# EAGLE board 13827-SparkFun Qwiic Adapter-panel.v10 (EAGLE 7.1.0), part 1 of 3
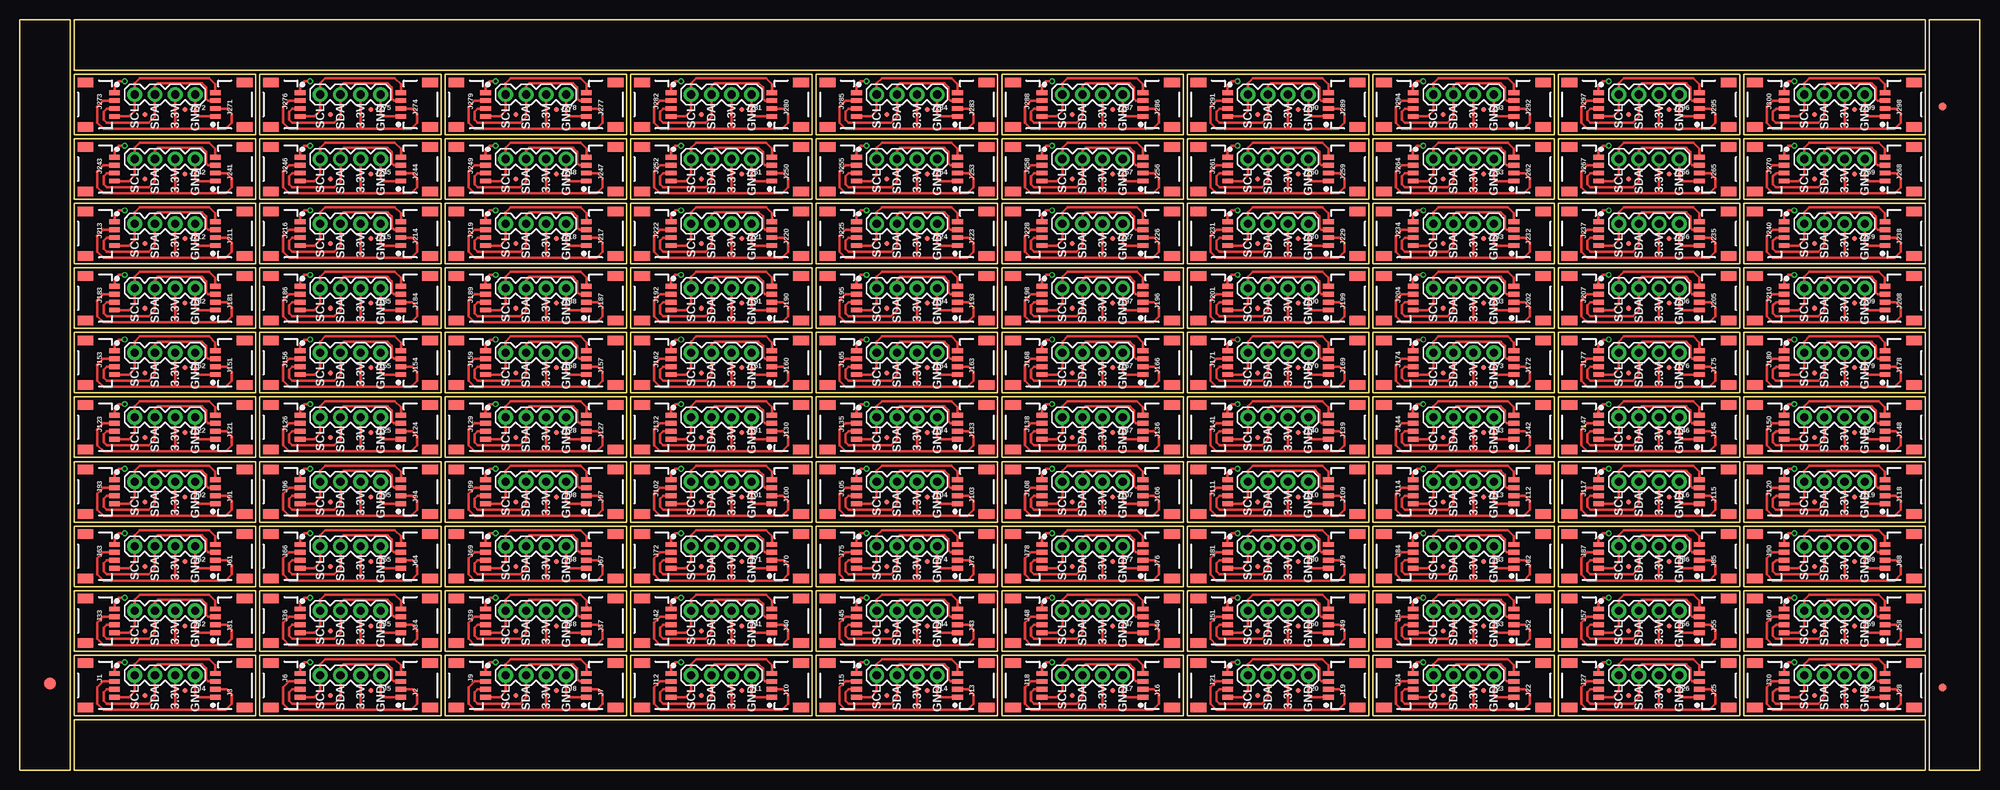
[diagram p0: board, top side]
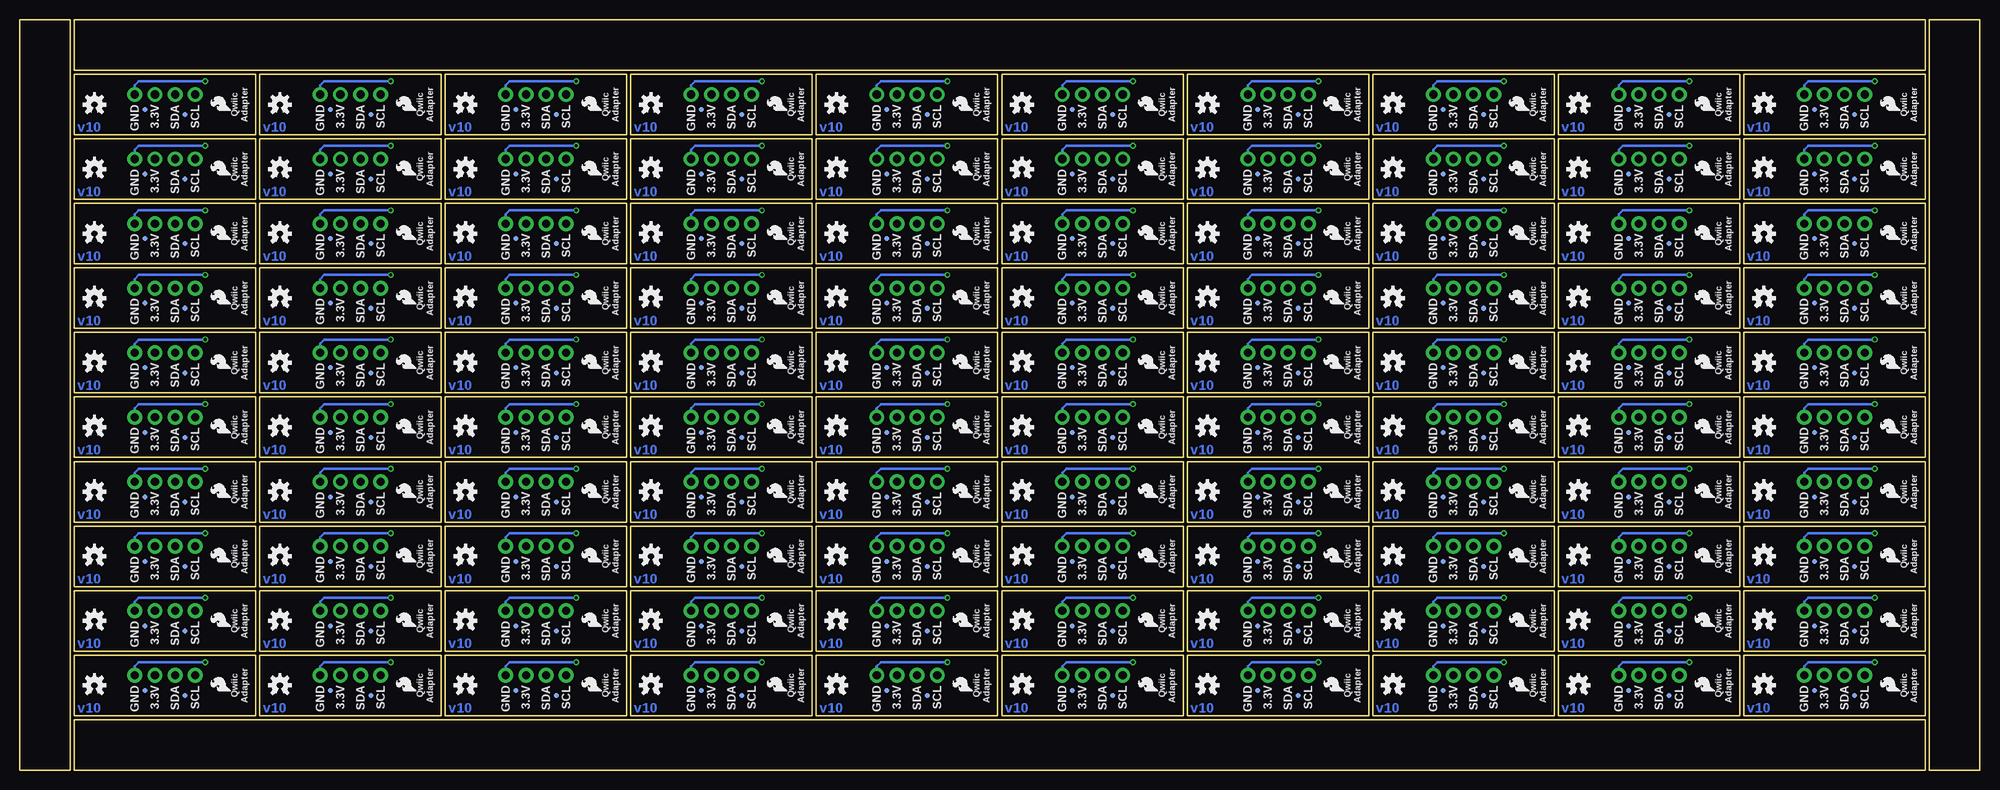
[diagram p1: board, bottom side, seen from below]

Size 246.89 x 94.49 mm. Coordinates in mm from the lower left corner, seen from the top.
Outline: 424 segments
Copper layers (1*16): Top 0.035mm / dielectric 1.5mm / Bottom 0.035mm
Design rules "SparkFun-2-layer-TIGHT": minimum track width 7mil, minimum drill 15mil, track to track 7mil, track to pad 7mil, pad to pad 7mil, via to via 7mil, smd to smd 7mil, copper to edge 7mil, drill to drill 7mil, minimum pad ring 7mil, minimum via ring 7mil, stop-mask expansion 4mil, vias tented up to drill 25mil, thermal gap 10mil

## Footprints (pad centres in the part's own frame; a part is rotated, then mirrored left to right if it is on the bottom)
FIDUCIAL-1.5X3 = smd 1.5 x 1.5: 1 0,0
FIDUCIAL-1X2 = smd 1 x 1: 1 0,0
FIDUCIAL-MICRO = smd 0.635 x 0.635: 1 0,0
1X04_1MM_RA = smd 0.6 x 1.35: 1 -1.5,0; 2 -0.5,0; 3 0.5,0; 4 1.5,0 | smd 1.2 x 2: NC1 2.8,-3.675; NC2 -2.8,-3.675
1X04 = drill 1.016 pad 1.88: 1 0,0; 2 2.54,0; 3 5.08,0; 4 7.62,0

## Placement (x,y rotation side)
E$1  [FIDUCIAL-1.5X3]  3.81,10.92 0 top
E$7  [FIDUCIAL-1X2]  242.19,83.57 180 top
E$8  [FIDUCIAL-1X2]  242.19,10.41 0 top
FD1  FIDUCIALUFIDUCIAL  [FIDUCIAL-MICRO]  15.75,9.4 0 top
FD2  FIDUCIALUFIDUCIAL  [FIDUCIAL-MICRO]  15.75,9.4 0 bottom
FD3  FIDUCIALUFIDUCIAL  [FIDUCIAL-MICRO]  20.83,10.03 0 top
FD4  FIDUCIALUFIDUCIAL  [FIDUCIAL-MICRO]  20.83,10.03 0 bottom
FD5  FIDUCIALUFIDUCIAL  [FIDUCIAL-MICRO]  39.12,9.4 0 top
FD6  FIDUCIALUFIDUCIAL  [FIDUCIAL-MICRO]  39.12,9.4 0 bottom
FD7  FIDUCIALUFIDUCIAL  [FIDUCIAL-MICRO]  44.2,10.03 0 top
FD8  FIDUCIALUFIDUCIAL  [FIDUCIAL-MICRO]  44.2,10.03 0 bottom
FD9  FIDUCIALUFIDUCIAL  [FIDUCIAL-MICRO]  62.48,9.4 0 top
FD10  FIDUCIALUFIDUCIAL  [FIDUCIAL-MICRO]  62.48,9.4 0 bottom
FD11  FIDUCIALUFIDUCIAL  [FIDUCIAL-MICRO]  67.56,10.03 0 top
FD12  FIDUCIALUFIDUCIAL  [FIDUCIAL-MICRO]  67.56,10.03 0 bottom
FD13  FIDUCIALUFIDUCIAL  [FIDUCIAL-MICRO]  85.85,9.4 0 top
FD14  FIDUCIALUFIDUCIAL  [FIDUCIAL-MICRO]  85.85,9.4 0 bottom
FD15  FIDUCIALUFIDUCIAL  [FIDUCIAL-MICRO]  90.93,10.03 0 top
FD16  FIDUCIALUFIDUCIAL  [FIDUCIAL-MICRO]  90.93,10.03 0 bottom
FD17  FIDUCIALUFIDUCIAL  [FIDUCIAL-MICRO]  109.22,9.4 0 top
FD18  FIDUCIALUFIDUCIAL  [FIDUCIAL-MICRO]  109.22,9.4 0 bottom
FD19  FIDUCIALUFIDUCIAL  [FIDUCIAL-MICRO]  114.3,10.03 0 top
FD20  FIDUCIALUFIDUCIAL  [FIDUCIAL-MICRO]  114.3,10.03 0 bottom
FD21  FIDUCIALUFIDUCIAL  [FIDUCIAL-MICRO]  132.59,9.4 0 top
FD22  FIDUCIALUFIDUCIAL  [FIDUCIAL-MICRO]  132.59,9.4 0 bottom
FD23  FIDUCIALUFIDUCIAL  [FIDUCIAL-MICRO]  137.67,10.03 0 top
FD24  FIDUCIALUFIDUCIAL  [FIDUCIAL-MICRO]  137.67,10.03 0 bottom
FD25  FIDUCIALUFIDUCIAL  [FIDUCIAL-MICRO]  155.96,9.4 0 top
FD26  FIDUCIALUFIDUCIAL  [FIDUCIAL-MICRO]  155.96,9.4 0 bottom
FD27  FIDUCIALUFIDUCIAL  [FIDUCIAL-MICRO]  161.04,10.03 0 top
FD28  FIDUCIALUFIDUCIAL  [FIDUCIAL-MICRO]  161.04,10.03 0 bottom
FD29  FIDUCIALUFIDUCIAL  [FIDUCIAL-MICRO]  179.32,9.4 0 top
FD30  FIDUCIALUFIDUCIAL  [FIDUCIAL-MICRO]  179.32,9.4 0 bottom
FD31  FIDUCIALUFIDUCIAL  [FIDUCIAL-MICRO]  184.4,10.03 0 top
FD32  FIDUCIALUFIDUCIAL  [FIDUCIAL-MICRO]  184.4,10.03 0 bottom
FD33  FIDUCIALUFIDUCIAL  [FIDUCIAL-MICRO]  202.69,9.4 0 top
FD34  FIDUCIALUFIDUCIAL  [FIDUCIAL-MICRO]  202.69,9.4 0 bottom
FD35  FIDUCIALUFIDUCIAL  [FIDUCIAL-MICRO]  207.77,10.03 0 top
FD36  FIDUCIALUFIDUCIAL  [FIDUCIAL-MICRO]  207.77,10.03 0 bottom
FD37  FIDUCIALUFIDUCIAL  [FIDUCIAL-MICRO]  226.06,9.4 0 top
FD38  FIDUCIALUFIDUCIAL  [FIDUCIAL-MICRO]  226.06,9.4 0 bottom
FD39  FIDUCIALUFIDUCIAL  [FIDUCIAL-MICRO]  231.14,10.03 0 top
FD40  FIDUCIALUFIDUCIAL  [FIDUCIAL-MICRO]  231.14,10.03 0 bottom
FD41  FIDUCIALUFIDUCIAL  [FIDUCIAL-MICRO]  15.75,17.53 0 top
FD42  FIDUCIALUFIDUCIAL  [FIDUCIAL-MICRO]  15.75,17.53 0 bottom
FD43  FIDUCIALUFIDUCIAL  [FIDUCIAL-MICRO]  20.83,18.16 0 top
FD44  FIDUCIALUFIDUCIAL  [FIDUCIAL-MICRO]  20.83,18.16 0 bottom
FD45  FIDUCIALUFIDUCIAL  [FIDUCIAL-MICRO]  39.12,17.53 0 top
FD46  FIDUCIALUFIDUCIAL  [FIDUCIAL-MICRO]  39.12,17.53 0 bottom
FD47  FIDUCIALUFIDUCIAL  [FIDUCIAL-MICRO]  44.2,18.16 0 top
FD48  FIDUCIALUFIDUCIAL  [FIDUCIAL-MICRO]  44.2,18.16 0 bottom
FD49  FIDUCIALUFIDUCIAL  [FIDUCIAL-MICRO]  62.48,17.53 0 top
FD50  FIDUCIALUFIDUCIAL  [FIDUCIAL-MICRO]  62.48,17.53 0 bottom
FD51  FIDUCIALUFIDUCIAL  [FIDUCIAL-MICRO]  67.56,18.16 0 top
FD52  FIDUCIALUFIDUCIAL  [FIDUCIAL-MICRO]  67.56,18.16 0 bottom
FD53  FIDUCIALUFIDUCIAL  [FIDUCIAL-MICRO]  85.85,17.53 0 top
FD54  FIDUCIALUFIDUCIAL  [FIDUCIAL-MICRO]  85.85,17.53 0 bottom
FD55  FIDUCIALUFIDUCIAL  [FIDUCIAL-MICRO]  90.93,18.16 0 top
FD56  FIDUCIALUFIDUCIAL  [FIDUCIAL-MICRO]  90.93,18.16 0 bottom
FD57  FIDUCIALUFIDUCIAL  [FIDUCIAL-MICRO]  109.22,17.53 0 top
FD58  FIDUCIALUFIDUCIAL  [FIDUCIAL-MICRO]  109.22,17.53 0 bottom
FD59  FIDUCIALUFIDUCIAL  [FIDUCIAL-MICRO]  114.3,18.16 0 top
FD60  FIDUCIALUFIDUCIAL  [FIDUCIAL-MICRO]  114.3,18.16 0 bottom
FD61  FIDUCIALUFIDUCIAL  [FIDUCIAL-MICRO]  132.59,17.53 0 top
FD62  FIDUCIALUFIDUCIAL  [FIDUCIAL-MICRO]  132.59,17.53 0 bottom
FD63  FIDUCIALUFIDUCIAL  [FIDUCIAL-MICRO]  137.67,18.16 0 top
FD64  FIDUCIALUFIDUCIAL  [FIDUCIAL-MICRO]  137.67,18.16 0 bottom
FD65  FIDUCIALUFIDUCIAL  [FIDUCIAL-MICRO]  155.96,17.53 0 top
FD66  FIDUCIALUFIDUCIAL  [FIDUCIAL-MICRO]  155.96,17.53 0 bottom
FD67  FIDUCIALUFIDUCIAL  [FIDUCIAL-MICRO]  161.04,18.16 0 top
FD68  FIDUCIALUFIDUCIAL  [FIDUCIAL-MICRO]  161.04,18.16 0 bottom
FD69  FIDUCIALUFIDUCIAL  [FIDUCIAL-MICRO]  179.32,17.53 0 top
FD70  FIDUCIALUFIDUCIAL  [FIDUCIAL-MICRO]  179.32,17.53 0 bottom
FD71  FIDUCIALUFIDUCIAL  [FIDUCIAL-MICRO]  184.4,18.16 0 top
FD72  FIDUCIALUFIDUCIAL  [FIDUCIAL-MICRO]  184.4,18.16 0 bottom
FD73  FIDUCIALUFIDUCIAL  [FIDUCIAL-MICRO]  202.69,17.53 0 top
FD74  FIDUCIALUFIDUCIAL  [FIDUCIAL-MICRO]  202.69,17.53 0 bottom
FD75  FIDUCIALUFIDUCIAL  [FIDUCIAL-MICRO]  207.77,18.16 0 top
FD76  FIDUCIALUFIDUCIAL  [FIDUCIAL-MICRO]  207.77,18.16 0 bottom
FD77  FIDUCIALUFIDUCIAL  [FIDUCIAL-MICRO]  226.06,17.53 0 top
FD78  FIDUCIALUFIDUCIAL  [FIDUCIAL-MICRO]  226.06,17.53 0 bottom
FD79  FIDUCIALUFIDUCIAL  [FIDUCIAL-MICRO]  231.14,18.16 0 top
FD80  FIDUCIALUFIDUCIAL  [FIDUCIAL-MICRO]  231.14,18.16 0 bottom
FD81  FIDUCIALUFIDUCIAL  [FIDUCIAL-MICRO]  15.75,25.65 0 top
FD82  FIDUCIALUFIDUCIAL  [FIDUCIAL-MICRO]  15.75,25.65 0 bottom
FD83  FIDUCIALUFIDUCIAL  [FIDUCIAL-MICRO]  20.83,26.29 0 top
FD84  FIDUCIALUFIDUCIAL  [FIDUCIAL-MICRO]  20.83,26.29 0 bottom
FD85  FIDUCIALUFIDUCIAL  [FIDUCIAL-MICRO]  39.12,25.65 0 top
FD86  FIDUCIALUFIDUCIAL  [FIDUCIAL-MICRO]  39.12,25.65 0 bottom
FD87  FIDUCIALUFIDUCIAL  [FIDUCIAL-MICRO]  44.2,26.29 0 top
FD88  FIDUCIALUFIDUCIAL  [FIDUCIAL-MICRO]  44.2,26.29 0 bottom
FD89  FIDUCIALUFIDUCIAL  [FIDUCIAL-MICRO]  62.48,25.65 0 top
FD90  FIDUCIALUFIDUCIAL  [FIDUCIAL-MICRO]  62.48,25.65 0 bottom
FD91  FIDUCIALUFIDUCIAL  [FIDUCIAL-MICRO]  67.56,26.29 0 top
FD92  FIDUCIALUFIDUCIAL  [FIDUCIAL-MICRO]  67.56,26.29 0 bottom
FD93  FIDUCIALUFIDUCIAL  [FIDUCIAL-MICRO]  85.85,25.65 0 top
FD94  FIDUCIALUFIDUCIAL  [FIDUCIAL-MICRO]  85.85,25.65 0 bottom
FD95  FIDUCIALUFIDUCIAL  [FIDUCIAL-MICRO]  90.93,26.29 0 top
FD96  FIDUCIALUFIDUCIAL  [FIDUCIAL-MICRO]  90.93,26.29 0 bottom
FD97  FIDUCIALUFIDUCIAL  [FIDUCIAL-MICRO]  109.22,25.65 0 top
FD98  FIDUCIALUFIDUCIAL  [FIDUCIAL-MICRO]  109.22,25.65 0 bottom
FD99  FIDUCIALUFIDUCIAL  [FIDUCIAL-MICRO]  114.3,26.29 0 top
FD100  FIDUCIALUFIDUCIAL  [FIDUCIAL-MICRO]  114.3,26.29 0 bottom
FD101  FIDUCIALUFIDUCIAL  [FIDUCIAL-MICRO]  132.59,25.65 0 top
FD102  FIDUCIALUFIDUCIAL  [FIDUCIAL-MICRO]  132.59,25.65 0 bottom
FD103  FIDUCIALUFIDUCIAL  [FIDUCIAL-MICRO]  137.67,26.29 0 top
FD104  FIDUCIALUFIDUCIAL  [FIDUCIAL-MICRO]  137.67,26.29 0 bottom
FD105  FIDUCIALUFIDUCIAL  [FIDUCIAL-MICRO]  155.96,25.65 0 top
FD106  FIDUCIALUFIDUCIAL  [FIDUCIAL-MICRO]  155.96,25.65 0 bottom
FD107  FIDUCIALUFIDUCIAL  [FIDUCIAL-MICRO]  161.04,26.29 0 top
FD108  FIDUCIALUFIDUCIAL  [FIDUCIAL-MICRO]  161.04,26.29 0 bottom
FD109  FIDUCIALUFIDUCIAL  [FIDUCIAL-MICRO]  179.32,25.65 0 top
FD110  FIDUCIALUFIDUCIAL  [FIDUCIAL-MICRO]  179.32,25.65 0 bottom
FD111  FIDUCIALUFIDUCIAL  [FIDUCIAL-MICRO]  184.4,26.29 0 top
FD112  FIDUCIALUFIDUCIAL  [FIDUCIAL-MICRO]  184.4,26.29 0 bottom
FD113  FIDUCIALUFIDUCIAL  [FIDUCIAL-MICRO]  202.69,25.65 0 top
FD114  FIDUCIALUFIDUCIAL  [FIDUCIAL-MICRO]  202.69,25.65 0 bottom
FD115  FIDUCIALUFIDUCIAL  [FIDUCIAL-MICRO]  207.77,26.29 0 top
FD116  FIDUCIALUFIDUCIAL  [FIDUCIAL-MICRO]  207.77,26.29 0 bottom
FD117  FIDUCIALUFIDUCIAL  [FIDUCIAL-MICRO]  226.06,25.65 0 top
FD118  FIDUCIALUFIDUCIAL  [FIDUCIAL-MICRO]  226.06,25.65 0 bottom
FD119  FIDUCIALUFIDUCIAL  [FIDUCIAL-MICRO]  231.14,26.29 0 top
FD120  FIDUCIALUFIDUCIAL  [FIDUCIAL-MICRO]  231.14,26.29 0 bottom
FD121  FIDUCIALUFIDUCIAL  [FIDUCIAL-MICRO]  15.75,33.78 0 top
FD122  FIDUCIALUFIDUCIAL  [FIDUCIAL-MICRO]  15.75,33.78 0 bottom
FD123  FIDUCIALUFIDUCIAL  [FIDUCIAL-MICRO]  20.83,34.42 0 top
FD124  FIDUCIALUFIDUCIAL  [FIDUCIAL-MICRO]  20.83,34.42 0 bottom
FD125  FIDUCIALUFIDUCIAL  [FIDUCIAL-MICRO]  39.12,33.78 0 top
FD126  FIDUCIALUFIDUCIAL  [FIDUCIAL-MICRO]  39.12,33.78 0 bottom
FD127  FIDUCIALUFIDUCIAL  [FIDUCIAL-MICRO]  44.2,34.42 0 top
FD128  FIDUCIALUFIDUCIAL  [FIDUCIAL-MICRO]  44.2,34.42 0 bottom
FD129  FIDUCIALUFIDUCIAL  [FIDUCIAL-MICRO]  62.48,33.78 0 top
FD130  FIDUCIALUFIDUCIAL  [FIDUCIAL-MICRO]  62.48,33.78 0 bottom
FD131  FIDUCIALUFIDUCIAL  [FIDUCIAL-MICRO]  67.56,34.42 0 top
FD132  FIDUCIALUFIDUCIAL  [FIDUCIAL-MICRO]  67.56,34.42 0 bottom
FD133  FIDUCIALUFIDUCIAL  [FIDUCIAL-MICRO]  85.85,33.78 0 top
FD134  FIDUCIALUFIDUCIAL  [FIDUCIAL-MICRO]  85.85,33.78 0 bottom
FD135  FIDUCIALUFIDUCIAL  [FIDUCIAL-MICRO]  90.93,34.42 0 top
FD136  FIDUCIALUFIDUCIAL  [FIDUCIAL-MICRO]  90.93,34.42 0 bottom
FD137  FIDUCIALUFIDUCIAL  [FIDUCIAL-MICRO]  109.22,33.78 0 top
FD138  FIDUCIALUFIDUCIAL  [FIDUCIAL-MICRO]  109.22,33.78 0 bottom
FD139  FIDUCIALUFIDUCIAL  [FIDUCIAL-MICRO]  114.3,34.42 0 top
FD140  FIDUCIALUFIDUCIAL  [FIDUCIAL-MICRO]  114.3,34.42 0 bottom
FD141  FIDUCIALUFIDUCIAL  [FIDUCIAL-MICRO]  132.59,33.78 0 top
FD142  FIDUCIALUFIDUCIAL  [FIDUCIAL-MICRO]  132.59,33.78 0 bottom
FD143  FIDUCIALUFIDUCIAL  [FIDUCIAL-MICRO]  137.67,34.42 0 top
FD144  FIDUCIALUFIDUCIAL  [FIDUCIAL-MICRO]  137.67,34.42 0 bottom
FD145  FIDUCIALUFIDUCIAL  [FIDUCIAL-MICRO]  155.96,33.78 0 top
FD146  FIDUCIALUFIDUCIAL  [FIDUCIAL-MICRO]  155.96,33.78 0 bottom
FD147  FIDUCIALUFIDUCIAL  [FIDUCIAL-MICRO]  161.04,34.42 0 top
FD148  FIDUCIALUFIDUCIAL  [FIDUCIAL-MICRO]  161.04,34.42 0 bottom
FD149  FIDUCIALUFIDUCIAL  [FIDUCIAL-MICRO]  179.32,33.78 0 top
FD150  FIDUCIALUFIDUCIAL  [FIDUCIAL-MICRO]  179.32,33.78 0 bottom
FD151  FIDUCIALUFIDUCIAL  [FIDUCIAL-MICRO]  184.4,34.42 0 top
FD152  FIDUCIALUFIDUCIAL  [FIDUCIAL-MICRO]  184.4,34.42 0 bottom
FD153  FIDUCIALUFIDUCIAL  [FIDUCIAL-MICRO]  202.69,33.78 0 top
FD154  FIDUCIALUFIDUCIAL  [FIDUCIAL-MICRO]  202.69,33.78 0 bottom
FD155  FIDUCIALUFIDUCIAL  [FIDUCIAL-MICRO]  207.77,34.42 0 top
FD156  FIDUCIALUFIDUCIAL  [FIDUCIAL-MICRO]  207.77,34.42 0 bottom
FD157  FIDUCIALUFIDUCIAL  [FIDUCIAL-MICRO]  226.06,33.78 0 top
FD158  FIDUCIALUFIDUCIAL  [FIDUCIAL-MICRO]  226.06,33.78 0 bottom
FD159  FIDUCIALUFIDUCIAL  [FIDUCIAL-MICRO]  231.14,34.42 0 top
FD160  FIDUCIALUFIDUCIAL  [FIDUCIAL-MICRO]  231.14,34.42 0 bottom
FD161  FIDUCIALUFIDUCIAL  [FIDUCIAL-MICRO]  15.75,41.91 0 top
FD162  FIDUCIALUFIDUCIAL  [FIDUCIAL-MICRO]  15.75,41.91 0 bottom
FD163  FIDUCIALUFIDUCIAL  [FIDUCIAL-MICRO]  20.83,42.55 0 top
FD164  FIDUCIALUFIDUCIAL  [FIDUCIAL-MICRO]  20.83,42.55 0 bottom
FD165  FIDUCIALUFIDUCIAL  [FIDUCIAL-MICRO]  39.12,41.91 0 top
FD166  FIDUCIALUFIDUCIAL  [FIDUCIAL-MICRO]  39.12,41.91 0 bottom
FD167  FIDUCIALUFIDUCIAL  [FIDUCIAL-MICRO]  44.2,42.55 0 top
FD168  FIDUCIALUFIDUCIAL  [FIDUCIAL-MICRO]  44.2,42.55 0 bottom
FD169  FIDUCIALUFIDUCIAL  [FIDUCIAL-MICRO]  62.48,41.91 0 top
FD170  FIDUCIALUFIDUCIAL  [FIDUCIAL-MICRO]  62.48,41.91 0 bottom
FD171  FIDUCIALUFIDUCIAL  [FIDUCIAL-MICRO]  67.56,42.55 0 top
FD172  FIDUCIALUFIDUCIAL  [FIDUCIAL-MICRO]  67.56,42.55 0 bottom
FD173  FIDUCIALUFIDUCIAL  [FIDUCIAL-MICRO]  85.85,41.91 0 top
FD174  FIDUCIALUFIDUCIAL  [FIDUCIAL-MICRO]  85.85,41.91 0 bottom
FD175  FIDUCIALUFIDUCIAL  [FIDUCIAL-MICRO]  90.93,42.55 0 top
FD176  FIDUCIALUFIDUCIAL  [FIDUCIAL-MICRO]  90.93,42.55 0 bottom
FD177  FIDUCIALUFIDUCIAL  [FIDUCIAL-MICRO]  109.22,41.91 0 top
FD178  FIDUCIALUFIDUCIAL  [FIDUCIAL-MICRO]  109.22,41.91 0 bottom
FD179  FIDUCIALUFIDUCIAL  [FIDUCIAL-MICRO]  114.3,42.55 0 top
FD180  FIDUCIALUFIDUCIAL  [FIDUCIAL-MICRO]  114.3,42.55 0 bottom
FD181  FIDUCIALUFIDUCIAL  [FIDUCIAL-MICRO]  132.59,41.91 0 top
FD182  FIDUCIALUFIDUCIAL  [FIDUCIAL-MICRO]  132.59,41.91 0 bottom
FD183  FIDUCIALUFIDUCIAL  [FIDUCIAL-MICRO]  137.67,42.55 0 top
FD184  FIDUCIALUFIDUCIAL  [FIDUCIAL-MICRO]  137.67,42.55 0 bottom
FD185  FIDUCIALUFIDUCIAL  [FIDUCIAL-MICRO]  155.96,41.91 0 top
FD186  FIDUCIALUFIDUCIAL  [FIDUCIAL-MICRO]  155.96,41.91 0 bottom
FD187  FIDUCIALUFIDUCIAL  [FIDUCIAL-MICRO]  161.04,42.55 0 top
FD188  FIDUCIALUFIDUCIAL  [FIDUCIAL-MICRO]  161.04,42.55 0 bottom
FD189  FIDUCIALUFIDUCIAL  [FIDUCIAL-MICRO]  179.32,41.91 0 top
FD190  FIDUCIALUFIDUCIAL  [FIDUCIAL-MICRO]  179.32,41.91 0 bottom
FD191  FIDUCIALUFIDUCIAL  [FIDUCIAL-MICRO]  184.4,42.55 0 top
FD192  FIDUCIALUFIDUCIAL  [FIDUCIAL-MICRO]  184.4,42.55 0 bottom
FD193  FIDUCIALUFIDUCIAL  [FIDUCIAL-MICRO]  202.69,41.91 0 top
FD194  FIDUCIALUFIDUCIAL  [FIDUCIAL-MICRO]  202.69,41.91 0 bottom
FD195  FIDUCIALUFIDUCIAL  [FIDUCIAL-MICRO]  207.77,42.55 0 top
FD196  FIDUCIALUFIDUCIAL  [FIDUCIAL-MICRO]  207.77,42.55 0 bottom
FD197  FIDUCIALUFIDUCIAL  [FIDUCIAL-MICRO]  226.06,41.91 0 top
FD198  FIDUCIALUFIDUCIAL  [FIDUCIAL-MICRO]  226.06,41.91 0 bottom
FD199  FIDUCIALUFIDUCIAL  [FIDUCIAL-MICRO]  231.14,42.55 0 top
FD200  FIDUCIALUFIDUCIAL  [FIDUCIAL-MICRO]  231.14,42.55 0 bottom
FD201  FIDUCIALUFIDUCIAL  [FIDUCIAL-MICRO]  15.75,50.04 0 top
FD202  FIDUCIALUFIDUCIAL  [FIDUCIAL-MICRO]  15.75,50.04 0 bottom
FD203  FIDUCIALUFIDUCIAL  [FIDUCIAL-MICRO]  20.83,50.67 0 top
FD204  FIDUCIALUFIDUCIAL  [FIDUCIAL-MICRO]  20.83,50.67 0 bottom
FD205  FIDUCIALUFIDUCIAL  [FIDUCIAL-MICRO]  39.12,50.04 0 top
FD206  FIDUCIALUFIDUCIAL  [FIDUCIAL-MICRO]  39.12,50.04 0 bottom
FD207  FIDUCIALUFIDUCIAL  [FIDUCIAL-MICRO]  44.2,50.67 0 top
FD208  FIDUCIALUFIDUCIAL  [FIDUCIAL-MICRO]  44.2,50.67 0 bottom
FD209  FIDUCIALUFIDUCIAL  [FIDUCIAL-MICRO]  62.48,50.04 0 top
FD210  FIDUCIALUFIDUCIAL  [FIDUCIAL-MICRO]  62.48,50.04 0 bottom
FD211  FIDUCIALUFIDUCIAL  [FIDUCIAL-MICRO]  67.56,50.67 0 top
FD212  FIDUCIALUFIDUCIAL  [FIDUCIAL-MICRO]  67.56,50.67 0 bottom
FD213  FIDUCIALUFIDUCIAL  [FIDUCIAL-MICRO]  85.85,50.04 0 top
FD214  FIDUCIALUFIDUCIAL  [FIDUCIAL-MICRO]  85.85,50.04 0 bottom
FD215  FIDUCIALUFIDUCIAL  [FIDUCIAL-MICRO]  90.93,50.67 0 top
FD216  FIDUCIALUFIDUCIAL  [FIDUCIAL-MICRO]  90.93,50.67 0 bottom
FD217  FIDUCIALUFIDUCIAL  [FIDUCIAL-MICRO]  109.22,50.04 0 top
FD218  FIDUCIALUFIDUCIAL  [FIDUCIAL-MICRO]  109.22,50.04 0 bottom
FD219  FIDUCIALUFIDUCIAL  [FIDUCIAL-MICRO]  114.3,50.67 0 top
FD220  FIDUCIALUFIDUCIAL  [FIDUCIAL-MICRO]  114.3,50.67 0 bottom
FD221  FIDUCIALUFIDUCIAL  [FIDUCIAL-MICRO]  132.59,50.04 0 top
FD222  FIDUCIALUFIDUCIAL  [FIDUCIAL-MICRO]  132.59,50.04 0 bottom
FD223  FIDUCIALUFIDUCIAL  [FIDUCIAL-MICRO]  137.67,50.67 0 top
FD224  FIDUCIALUFIDUCIAL  [FIDUCIAL-MICRO]  137.67,50.67 0 bottom
FD225  FIDUCIALUFIDUCIAL  [FIDUCIAL-MICRO]  155.96,50.04 0 top
FD226  FIDUCIALUFIDUCIAL  [FIDUCIAL-MICRO]  155.96,50.04 0 bottom
FD227  FIDUCIALUFIDUCIAL  [FIDUCIAL-MICRO]  161.04,50.67 0 top
FD228  FIDUCIALUFIDUCIAL  [FIDUCIAL-MICRO]  161.04,50.67 0 bottom
FD229  FIDUCIALUFIDUCIAL  [FIDUCIAL-MICRO]  179.32,50.04 0 top
FD230  FIDUCIALUFIDUCIAL  [FIDUCIAL-MICRO]  179.32,50.04 0 bottom
FD231  FIDUCIALUFIDUCIAL  [FIDUCIAL-MICRO]  184.4,50.67 0 top
FD232  FIDUCIALUFIDUCIAL  [FIDUCIAL-MICRO]  184.4,50.67 0 bottom
FD233  FIDUCIALUFIDUCIAL  [FIDUCIAL-MICRO]  202.69,50.04 0 top
FD234  FIDUCIALUFIDUCIAL  [FIDUCIAL-MICRO]  202.69,50.04 0 bottom
FD235  FIDUCIALUFIDUCIAL  [FIDUCIAL-MICRO]  207.77,50.67 0 top
FD236  FIDUCIALUFIDUCIAL  [FIDUCIAL-MICRO]  207.77,50.67 0 bottom
FD237  FIDUCIALUFIDUCIAL  [FIDUCIAL-MICRO]  226.06,50.04 0 top
FD238  FIDUCIALUFIDUCIAL  [FIDUCIAL-MICRO]  226.06,50.04 0 bottom
FD239  FIDUCIALUFIDUCIAL  [FIDUCIAL-MICRO]  231.14,50.67 0 top
FD240  FIDUCIALUFIDUCIAL  [FIDUCIAL-MICRO]  231.14,50.67 0 bottom
FD241  FIDUCIALUFIDUCIAL  [FIDUCIAL-MICRO]  15.75,58.17 0 top
FD242  FIDUCIALUFIDUCIAL  [FIDUCIAL-MICRO]  15.75,58.17 0 bottom
FD243  FIDUCIALUFIDUCIAL  [FIDUCIAL-MICRO]  20.83,58.8 0 top
FD244  FIDUCIALUFIDUCIAL  [FIDUCIAL-MICRO]  20.83,58.8 0 bottom
FD245  FIDUCIALUFIDUCIAL  [FIDUCIAL-MICRO]  39.12,58.17 0 top
FD246  FIDUCIALUFIDUCIAL  [FIDUCIAL-MICRO]  39.12,58.17 0 bottom
FD247  FIDUCIALUFIDUCIAL  [FIDUCIAL-MICRO]  44.2,58.8 0 top
FD248  FIDUCIALUFIDUCIAL  [FIDUCIAL-MICRO]  44.2,58.8 0 bottom
FD249  FIDUCIALUFIDUCIAL  [FIDUCIAL-MICRO]  62.48,58.17 0 top
FD250  FIDUCIALUFIDUCIAL  [FIDUCIAL-MICRO]  62.48,58.17 0 bottom
FD251  FIDUCIALUFIDUCIAL  [FIDUCIAL-MICRO]  67.56,58.8 0 top
FD252  FIDUCIALUFIDUCIAL  [FIDUCIAL-MICRO]  67.56,58.8 0 bottom
FD253  FIDUCIALUFIDUCIAL  [FIDUCIAL-MICRO]  85.85,58.17 0 top
FD254  FIDUCIALUFIDUCIAL  [FIDUCIAL-MICRO]  85.85,58.17 0 bottom
FD255  FIDUCIALUFIDUCIAL  [FIDUCIAL-MICRO]  90.93,58.8 0 top
FD256  FIDUCIALUFIDUCIAL  [FIDUCIAL-MICRO]  90.93,58.8 0 bottom
FD257  FIDUCIALUFIDUCIAL  [FIDUCIAL-MICRO]  109.22,58.17 0 top
FD258  FIDUCIALUFIDUCIAL  [FIDUCIAL-MICRO]  109.22,58.17 0 bottom
FD259  FIDUCIALUFIDUCIAL  [FIDUCIAL-MICRO]  114.3,58.8 0 top
FD260  FIDUCIALUFIDUCIAL  [FIDUCIAL-MICRO]  114.3,58.8 0 bottom
FD261  FIDUCIALUFIDUCIAL  [FIDUCIAL-MICRO]  132.59,58.17 0 top
FD262  FIDUCIALUFIDUCIAL  [FIDUCIAL-MICRO]  132.59,58.17 0 bottom
FD263  FIDUCIALUFIDUCIAL  [FIDUCIAL-MICRO]  137.67,58.8 0 top
FD264  FIDUCIALUFIDUCIAL  [FIDUCIAL-MICRO]  137.67,58.8 0 bottom
FD265  FIDUCIALUFIDUCIAL  [FIDUCIAL-MICRO]  155.96,58.17 0 top
FD266  FIDUCIALUFIDUCIAL  [FIDUCIAL-MICRO]  155.96,58.17 0 bottom
FD267  FIDUCIALUFIDUCIAL  [FIDUCIAL-MICRO]  161.04,58.8 0 top
FD268  FIDUCIALUFIDUCIAL  [FIDUCIAL-MICRO]  161.04,58.8 0 bottom
FD269  FIDUCIALUFIDUCIAL  [FIDUCIAL-MICRO]  179.32,58.17 0 top
FD270  FIDUCIALUFIDUCIAL  [FIDUCIAL-MICRO]  179.32,58.17 0 bottom
FD271  FIDUCIALUFIDUCIAL  [FIDUCIAL-MICRO]  184.4,58.8 0 top
FD272  FIDUCIALUFIDUCIAL  [FIDUCIAL-MICRO]  184.4,58.8 0 bottom
FD273  FIDUCIALUFIDUCIAL  [FIDUCIAL-MICRO]  202.69,58.17 0 top
FD274  FIDUCIALUFIDUCIAL  [FIDUCIAL-MICRO]  202.69,58.17 0 bottom
FD275  FIDUCIALUFIDUCIAL  [FIDUCIAL-MICRO]  207.77,58.8 0 top
FD276  FIDUCIALUFIDUCIAL  [FIDUCIAL-MICRO]  207.77,58.8 0 bottom
FD277  FIDUCIALUFIDUCIAL  [FIDUCIAL-MICRO]  226.06,58.17 0 top
FD278  FIDUCIALUFIDUCIAL  [FIDUCIAL-MICRO]  226.06,58.17 0 bottom
FD279  FIDUCIALUFIDUCIAL  [FIDUCIAL-MICRO]  231.14,58.8 0 top
FD280  FIDUCIALUFIDUCIAL  [FIDUCIAL-MICRO]  231.14,58.8 0 bottom
FD281  FIDUCIALUFIDUCIAL  [FIDUCIAL-MICRO]  15.75,66.29 0 top
FD282  FIDUCIALUFIDUCIAL  [FIDUCIAL-MICRO]  15.75,66.29 0 bottom
FD283  FIDUCIALUFIDUCIAL  [FIDUCIAL-MICRO]  20.83,66.93 0 top
FD284  FIDUCIALUFIDUCIAL  [FIDUCIAL-MICRO]  20.83,66.93 0 bottom
FD285  FIDUCIALUFIDUCIAL  [FIDUCIAL-MICRO]  39.12,66.29 0 top
FD286  FIDUCIALUFIDUCIAL  [FIDUCIAL-MICRO]  39.12,66.29 0 bottom
FD287  FIDUCIALUFIDUCIAL  [FIDUCIAL-MICRO]  44.2,66.93 0 top
FD288  FIDUCIALUFIDUCIAL  [FIDUCIAL-MICRO]  44.2,66.93 0 bottom
FD289  FIDUCIALUFIDUCIAL  [FIDUCIAL-MICRO]  62.48,66.29 0 top
FD290  FIDUCIALUFIDUCIAL  [FIDUCIAL-MICRO]  62.48,66.29 0 bottom
FD291  FIDUCIALUFIDUCIAL  [FIDUCIAL-MICRO]  67.56,66.93 0 top
FD292  FIDUCIALUFIDUCIAL  [FIDUCIAL-MICRO]  67.56,66.93 0 bottom
FD293  FIDUCIALUFIDUCIAL  [FIDUCIAL-MICRO]  85.85,66.29 0 top
FD294  FIDUCIALUFIDUCIAL  [FIDUCIAL-MICRO]  85.85,66.29 0 bottom
FD295  FIDUCIALUFIDUCIAL  [FIDUCIAL-MICRO]  90.93,66.93 0 top
FD296  FIDUCIALUFIDUCIAL  [FIDUCIAL-MICRO]  90.93,66.93 0 bottom
FD297  FIDUCIALUFIDUCIAL  [FIDUCIAL-MICRO]  109.22,66.29 0 top
FD298  FIDUCIALUFIDUCIAL  [FIDUCIAL-MICRO]  109.22,66.29 0 bottom
FD299  FIDUCIALUFIDUCIAL  [FIDUCIAL-MICRO]  114.3,66.93 0 top
FD300  FIDUCIALUFIDUCIAL  [FIDUCIAL-MICRO]  114.3,66.93 0 bottom
FD301  FIDUCIALUFIDUCIAL  [FIDUCIAL-MICRO]  132.59,66.29 0 top
FD302  FIDUCIALUFIDUCIAL  [FIDUCIAL-MICRO]  132.59,66.29 0 bottom
FD303  FIDUCIALUFIDUCIAL  [FIDUCIAL-MICRO]  137.67,66.93 0 top
FD304  FIDUCIALUFIDUCIAL  [FIDUCIAL-MICRO]  137.67,66.93 0 bottom
FD305  FIDUCIALUFIDUCIAL  [FIDUCIAL-MICRO]  155.96,66.29 0 top
FD306  FIDUCIALUFIDUCIAL  [FIDUCIAL-MICRO]  155.96,66.29 0 bottom
FD307  FIDUCIALUFIDUCIAL  [FIDUCIAL-MICRO]  161.04,66.93 0 top
FD308  FIDUCIALUFIDUCIAL  [FIDUCIAL-MICRO]  161.04,66.93 0 bottom
FD309  FIDUCIALUFIDUCIAL  [FIDUCIAL-MICRO]  179.32,66.29 0 top
FD310  FIDUCIALUFIDUCIAL  [FIDUCIAL-MICRO]  179.32,66.29 0 bottom
FD311  FIDUCIALUFIDUCIAL  [FIDUCIAL-MICRO]  184.4,66.93 0 top
FD312  FIDUCIALUFIDUCIAL  [FIDUCIAL-MICRO]  184.4,66.93 0 bottom
FD313  FIDUCIALUFIDUCIAL  [FIDUCIAL-MICRO]  202.69,66.29 0 top
FD314  FIDUCIALUFIDUCIAL  [FIDUCIAL-MICRO]  202.69,66.29 0 bottom
FD315  FIDUCIALUFIDUCIAL  [FIDUCIAL-MICRO]  207.77,66.93 0 top
FD316  FIDUCIALUFIDUCIAL  [FIDUCIAL-MICRO]  207.77,66.93 0 bottom
FD317  FIDUCIALUFIDUCIAL  [FIDUCIAL-MICRO]  226.06,66.29 0 top
FD318  FIDUCIALUFIDUCIAL  [FIDUCIAL-MICRO]  226.06,66.29 0 bottom
FD319  FIDUCIALUFIDUCIAL  [FIDUCIAL-MICRO]  231.14,66.93 0 top
FD320  FIDUCIALUFIDUCIAL  [FIDUCIAL-MICRO]  231.14,66.93 0 bottom
FD321  FIDUCIALUFIDUCIAL  [FIDUCIAL-MICRO]  15.75,74.42 0 top
FD322  FIDUCIALUFIDUCIAL  [FIDUCIAL-MICRO]  15.75,74.42 0 bottom
FD323  FIDUCIALUFIDUCIAL  [FIDUCIAL-MICRO]  20.83,75.06 0 top
FD324  FIDUCIALUFIDUCIAL  [FIDUCIAL-MICRO]  20.83,75.06 0 bottom
FD325  FIDUCIALUFIDUCIAL  [FIDUCIAL-MICRO]  39.12,74.42 0 top
FD326  FIDUCIALUFIDUCIAL  [FIDUCIAL-MICRO]  39.12,74.42 0 bottom
FD327  FIDUCIALUFIDUCIAL  [FIDUCIAL-MICRO]  44.2,75.06 0 top
FD328  FIDUCIALUFIDUCIAL  [FIDUCIAL-MICRO]  44.2,75.06 0 bottom
FD329  FIDUCIALUFIDUCIAL  [FIDUCIAL-MICRO]  62.48,74.42 0 top
FD330  FIDUCIALUFIDUCIAL  [FIDUCIAL-MICRO]  62.48,74.42 0 bottom
FD331  FIDUCIALUFIDUCIAL  [FIDUCIAL-MICRO]  67.56,75.06 0 top
FD332  FIDUCIALUFIDUCIAL  [FIDUCIAL-MICRO]  67.56,75.06 0 bottom
FD333  FIDUCIALUFIDUCIAL  [FIDUCIAL-MICRO]  85.85,74.42 0 top
FD334  FIDUCIALUFIDUCIAL  [FIDUCIAL-MICRO]  85.85,74.42 0 bottom
FD335  FIDUCIALUFIDUCIAL  [FIDUCIAL-MICRO]  90.93,75.06 0 top
FD336  FIDUCIALUFIDUCIAL  [FIDUCIAL-MICRO]  90.93,75.06 0 bottom
FD337  FIDUCIALUFIDUCIAL  [FIDUCIAL-MICRO]  109.22,74.42 0 top
FD338  FIDUCIALUFIDUCIAL  [FIDUCIAL-MICRO]  109.22,74.42 0 bottom
FD339  FIDUCIALUFIDUCIAL  [FIDUCIAL-MICRO]  114.3,75.06 0 top
FD340  FIDUCIALUFIDUCIAL  [FIDUCIAL-MICRO]  114.3,75.06 0 bottom
FD341  FIDUCIALUFIDUCIAL  [FIDUCIAL-MICRO]  132.59,74.42 0 top
FD342  FIDUCIALUFIDUCIAL  [FIDUCIAL-MICRO]  132.59,74.42 0 bottom
FD343  FIDUCIALUFIDUCIAL  [FIDUCIAL-MICRO]  137.67,75.06 0 top
FD344  FIDUCIALUFIDUCIAL  [FIDUCIAL-MICRO]  137.67,75.06 0 bottom
FD345  FIDUCIALUFIDUCIAL  [FIDUCIAL-MICRO]  155.96,74.42 0 top
FD346  FIDUCIALUFIDUCIAL  [FIDUCIAL-MICRO]  155.96,74.42 0 bottom
FD347  FIDUCIALUFIDUCIAL  [FIDUCIAL-MICRO]  161.04,75.06 0 top
FD348  FIDUCIALUFIDUCIAL  [FIDUCIAL-MICRO]  161.04,75.06 0 bottom
FD349  FIDUCIALUFIDUCIAL  [FIDUCIAL-MICRO]  179.32,74.42 0 top
FD350  FIDUCIALUFIDUCIAL  [FIDUCIAL-MICRO]  179.32,74.42 0 bottom
FD351  FIDUCIALUFIDUCIAL  [FIDUCIAL-MICRO]  184.4,75.06 0 top
FD352  FIDUCIALUFIDUCIAL  [FIDUCIAL-MICRO]  184.4,75.06 0 bottom
FD353  FIDUCIALUFIDUCIAL  [FIDUCIAL-MICRO]  202.69,74.42 0 top
FD354  FIDUCIALUFIDUCIAL  [FIDUCIAL-MICRO]  202.69,74.42 0 bottom
FD355  FIDUCIALUFIDUCIAL  [FIDUCIAL-MICRO]  207.77,75.06 0 top
FD356  FIDUCIALUFIDUCIAL  [FIDUCIAL-MICRO]  207.77,75.06 0 bottom
FD357  FIDUCIALUFIDUCIAL  [FIDUCIAL-MICRO]  226.06,74.42 0 top
FD358  FIDUCIALUFIDUCIAL  [FIDUCIAL-MICRO]  226.06,74.42 0 bottom
FD359  FIDUCIALUFIDUCIAL  [FIDUCIAL-MICRO]  231.14,75.06 0 top
FD360  FIDUCIALUFIDUCIAL  [FIDUCIAL-MICRO]  231.14,75.06 0 bottom
FD361  FIDUCIALUFIDUCIAL  [FIDUCIAL-MICRO]  15.75,82.55 0 top
FD362  FIDUCIALUFIDUCIAL  [FIDUCIAL-MICRO]  15.75,82.55 0 bottom
FD363  FIDUCIALUFIDUCIAL  [FIDUCIAL-MICRO]  20.83,83.19 0 top
FD364  FIDUCIALUFIDUCIAL  [FIDUCIAL-MICRO]  20.83,83.19 0 bottom
FD365  FIDUCIALUFIDUCIAL  [FIDUCIAL-MICRO]  39.12,82.55 0 top
FD366  FIDUCIALUFIDUCIAL  [FIDUCIAL-MICRO]  39.12,82.55 0 bottom
FD367  FIDUCIALUFIDUCIAL  [FIDUCIAL-MICRO]  44.2,83.19 0 top
FD368  FIDUCIALUFIDUCIAL  [FIDUCIAL-MICRO]  44.2,83.19 0 bottom
FD369  FIDUCIALUFIDUCIAL  [FIDUCIAL-MICRO]  62.48,82.55 0 top
FD370  FIDUCIALUFIDUCIAL  [FIDUCIAL-MICRO]  62.48,82.55 0 bottom
FD371  FIDUCIALUFIDUCIAL  [FIDUCIAL-MICRO]  67.56,83.19 0 top
FD372  FIDUCIALUFIDUCIAL  [FIDUCIAL-MICRO]  67.56,83.19 0 bottom
FD373  FIDUCIALUFIDUCIAL  [FIDUCIAL-MICRO]  85.85,82.55 0 top
FD374  FIDUCIALUFIDUCIAL  [FIDUCIAL-MICRO]  85.85,82.55 0 bottom
FD375  FIDUCIALUFIDUCIAL  [FIDUCIAL-MICRO]  90.93,83.19 0 top
FD376  FIDUCIALUFIDUCIAL  [FIDUCIAL-MICRO]  90.93,83.19 0 bottom
FD377  FIDUCIALUFIDUCIAL  [FIDUCIAL-MICRO]  109.22,82.55 0 top
FD378  FIDUCIALUFIDUCIAL  [FIDUCIAL-MICRO]  109.22,82.55 0 bottom
FD379  FIDUCIALUFIDUCIAL  [FIDUCIAL-MICRO]  114.3,83.19 0 top
FD380  FIDUCIALUFIDUCIAL  [FIDUCIAL-MICRO]  114.3,83.19 0 bottom
FD381  FIDUCIALUFIDUCIAL  [FIDUCIAL-MICRO]  132.59,82.55 0 top
FD382  FIDUCIALUFIDUCIAL  [FIDUCIAL-MICRO]  132.59,82.55 0 bottom
FD383  FIDUCIALUFIDUCIAL  [FIDUCIAL-MICRO]  137.67,83.19 0 top
FD384  FIDUCIALUFIDUCIAL  [FIDUCIAL-MICRO]  137.67,83.19 0 bottom
FD385  FIDUCIALUFIDUCIAL  [FIDUCIAL-MICRO]  155.96,82.55 0 top
FD386  FIDUCIALUFIDUCIAL  [FIDUCIAL-MICRO]  155.96,82.55 0 bottom
FD387  FIDUCIALUFIDUCIAL  [FIDUCIAL-MICRO]  161.04,83.19 0 top
FD388  FIDUCIALUFIDUCIAL  [FIDUCIAL-MICRO]  161.04,83.19 0 bottom
FD389  FIDUCIALUFIDUCIAL  [FIDUCIAL-MICRO]  179.32,82.55 0 top
FD390  FIDUCIALUFIDUCIAL  [FIDUCIAL-MICRO]  179.32,82.55 0 bottom
FD391  FIDUCIALUFIDUCIAL  [FIDUCIAL-MICRO]  184.4,83.19 0 top
FD392  FIDUCIALUFIDUCIAL  [FIDUCIAL-MICRO]  184.4,83.19 0 bottom
FD393  FIDUCIALUFIDUCIAL  [FIDUCIAL-MICRO]  202.69,82.55 0 top
FD394  FIDUCIALUFIDUCIAL  [FIDUCIAL-MICRO]  202.69,82.55 0 bottom
FD395  FIDUCIALUFIDUCIAL  [FIDUCIAL-MICRO]  207.77,83.19 0 top
FD396  FIDUCIALUFIDUCIAL  [FIDUCIAL-MICRO]  207.77,83.19 0 bottom
FD397  FIDUCIALUFIDUCIAL  [FIDUCIAL-MICRO]  226.06,82.55 0 top
FD398  FIDUCIALUFIDUCIAL  [FIDUCIAL-MICRO]  226.06,82.55 0 bottom
FD399  FIDUCIALUFIDUCIAL  [FIDUCIAL-MICRO]  231.14,83.19 0 top
FD400  FIDUCIALUFIDUCIAL  [FIDUCIAL-MICRO]  231.14,83.19 0 bottom
J1  [1X04_1MM_RA]  11.94,10.67 270 top
J2  [1X04_1MM_RA]  48.01,10.67 90 top
J3  [1X04_1MM_RA]  24.64,10.67 90 top
J4  PTH  [1X04]  22.1,11.94 180 top
J5  PTH  [1X04]  45.47,11.94 180 top
J6  [1X04_1MM_RA]  35.31,10.67 270 top
J7  [1X04_1MM_RA]  71.37,10.67 90 top
J8  PTH  [1X04]  68.83,11.94 180 top
J9  [1X04_1MM_RA]  58.67,10.67 270 top
J10  [1X04_1MM_RA]  94.74,10.67 90 top
J11  PTH  [1X04]  92.2,11.94 180 top
J12  [1X04_1MM_RA]  82.04,10.67 270 top
J13  [1X04_1MM_RA]  118.11,10.67 90 top
J14  PTH  [1X04]  115.57,11.94 180 top
J15  [1X04_1MM_RA]  105.41,10.67 270 top
J16  [1X04_1MM_RA]  141.48,10.67 90 top
J17  PTH  [1X04]  138.94,11.94 180 top
J18  [1X04_1MM_RA]  128.78,10.67 270 top
J19  [1X04_1MM_RA]  164.85,10.67 90 top
J20  PTH  [1X04]  162.31,11.94 180 top
J21  [1X04_1MM_RA]  152.15,10.67 270 top
J22  [1X04_1MM_RA]  188.21,10.67 90 top
J23  PTH  [1X04]  185.67,11.94 180 top
J24  [1X04_1MM_RA]  175.51,10.67 270 top
J25  [1X04_1MM_RA]  211.58,10.67 90 top
J26  PTH  [1X04]  209.04,11.94 180 top
J27  [1X04_1MM_RA]  198.88,10.67 270 top
J28  [1X04_1MM_RA]  234.95,10.67 90 top
J29  PTH  [1X04]  232.41,11.94 180 top
J30  [1X04_1MM_RA]  222.25,10.67 270 top
J31  [1X04_1MM_RA]  24.64,18.8 90 top
J32  PTH  [1X04]  22.1,20.07 180 top
J33  [1X04_1MM_RA]  11.94,18.8 270 top
J34  [1X04_1MM_RA]  48.01,18.8 90 top
J35  PTH  [1X04]  45.47,20.07 180 top
J36  [1X04_1MM_RA]  35.31,18.8 270 top
J37  [1X04_1MM_RA]  71.37,18.8 90 top
J38  PTH  [1X04]  68.83,20.07 180 top
J39  [1X04_1MM_RA]  58.67,18.8 270 top
J40  [1X04_1MM_RA]  94.74,18.8 90 top
J41  PTH  [1X04]  92.2,20.07 180 top
J42  [1X04_1MM_RA]  82.04,18.8 270 top
J43  [1X04_1MM_RA]  118.11,18.8 90 top
J44  PTH  [1X04]  115.57,20.07 180 top
J45  [1X04_1MM_RA]  105.41,18.8 270 top
J46  [1X04_1MM_RA]  141.48,18.8 90 top
J47  PTH  [1X04]  138.94,20.07 180 top
J48  [1X04_1MM_RA]  128.78,18.8 270 top
J49  [1X04_1MM_RA]  164.85,18.8 90 top
J50  PTH  [1X04]  162.31,20.07 180 top
J51  [1X04_1MM_RA]  152.15,18.8 270 top
J52  [1X04_1MM_RA]  188.21,18.8 90 top
J53  PTH  [1X04]  185.67,20.07 180 top
J54  [1X04_1MM_RA]  175.51,18.8 270 top
J55  [1X04_1MM_RA]  211.58,18.8 90 top
J56  PTH  [1X04]  209.04,20.07 180 top
J57  [1X04_1MM_RA]  198.88,18.8 270 top
J58  [1X04_1MM_RA]  234.95,18.8 90 top
J59  PTH  [1X04]  232.41,20.07 180 top
J60  [1X04_1MM_RA]  222.25,18.8 270 top
J61  [1X04_1MM_RA]  24.64,26.92 90 top
J62  PTH  [1X04]  22.1,28.19 180 top
J63  [1X04_1MM_RA]  11.94,26.92 270 top
J64  [1X04_1MM_RA]  48.01,26.92 90 top
J65  PTH  [1X04]  45.47,28.19 180 top
J66  [1X04_1MM_RA]  35.31,26.92 270 top
J67  [1X04_1MM_RA]  71.37,26.92 90 top
J68  PTH  [1X04]  68.83,28.19 180 top
J69  [1X04_1MM_RA]  58.67,26.92 270 top
J70  [1X04_1MM_RA]  94.74,26.92 90 top
J71  PTH  [1X04]  92.2,28.19 180 top
J72  [1X04_1MM_RA]  82.04,26.92 270 top
J73  [1X04_1MM_RA]  118.11,26.92 90 top
J74  PTH  [1X04]  115.57,28.19 180 top
J75  [1X04_1MM_RA]  105.41,26.92 270 top
J76  [1X04_1MM_RA]  141.48,26.92 90 top
J77  PTH  [1X04]  138.94,28.19 180 top
J78  [1X04_1MM_RA]  128.78,26.92 270 top
J79  [1X04_1MM_RA]  164.85,26.92 90 top
J80  PTH  [1X04]  162.31,28.19 180 top
J81  [1X04_1MM_RA]  152.15,26.92 270 top
J82  [1X04_1MM_RA]  188.21,26.92 90 top
J83  PTH  [1X04]  185.67,28.19 180 top
J84  [1X04_1MM_RA]  175.51,26.92 270 top
J85  [1X04_1MM_RA]  211.58,26.92 90 top
J86  PTH  [1X04]  209.04,28.19 180 top
J87  [1X04_1MM_RA]  198.88,26.92 270 top
J88  [1X04_1MM_RA]  234.95,26.92 90 top
J89  PTH  [1X04]  232.41,28.19 180 top
J90  [1X04_1MM_RA]  222.25,26.92 270 top
J91  [1X04_1MM_RA]  24.64,35.05 90 top
J92  PTH  [1X04]  22.1,36.32 180 top
J93  [1X04_1MM_RA]  11.94,35.05 270 top
J94  [1X04_1MM_RA]  48.01,35.05 90 top
J95  PTH  [1X04]  45.47,36.32 180 top
J96  [1X04_1MM_RA]  35.31,35.05 270 top
J97  [1X04_1MM_RA]  71.37,35.05 90 top
J98  PTH  [1X04]  68.83,36.32 180 top
J99  [1X04_1MM_RA]  58.67,35.05 270 top
J100  [1X04_1MM_RA]  94.74,35.05 90 top
J101  PTH  [1X04]  92.2,36.32 180 top
J102  [1X04_1MM_RA]  82.04,35.05 270 top
J103  [1X04_1MM_RA]  118.11,35.05 90 top
J104  PTH  [1X04]  115.57,36.32 180 top
J105  [1X04_1MM_RA]  105.41,35.05 270 top
J106  [1X04_1MM_RA]  141.48,35.05 90 top
J107  PTH  [1X04]  138.94,36.32 180 top
J108  [1X04_1MM_RA]  128.78,35.05 270 top
J109  [1X04_1MM_RA]  164.85,35.05 90 top
J110  PTH  [1X04]  162.31,36.32 180 top
J111  [1X04_1MM_RA]  152.15,35.05 270 top
J112  [1X04_1MM_RA]  188.21,35.05 90 top
J113  PTH  [1X04]  185.67,36.32 180 top
J114  [1X04_1MM_RA]  175.51,35.05 270 top
J115  [1X04_1MM_RA]  211.58,35.05 90 top
J116  PTH  [1X04]  209.04,36.32 180 top
J117  [1X04_1MM_RA]  198.88,35.05 270 top
J118  [1X04_1MM_RA]  234.95,35.05 90 top
J119  PTH  [1X04]  232.41,36.32 180 top
J120  [1X04_1MM_RA]  222.25,35.05 270 top
J121  [1X04_1MM_RA]  24.64,43.18 90 top
J122  PTH  [1X04]  22.1,44.45 180 top
J123  [1X04_1MM_RA]  11.94,43.18 270 top
J124  [1X04_1MM_RA]  48.01,43.18 90 top
J125  PTH  [1X04]  45.47,44.45 180 top
J126  [1X04_1MM_RA]  35.31,43.18 270 top
J127  [1X04_1MM_RA]  71.37,43.18 90 top
J128  PTH  [1X04]  68.83,44.45 180 top
J129  [1X04_1MM_RA]  58.67,43.18 270 top
J130  [1X04_1MM_RA]  94.74,43.18 90 top
J131  PTH  [1X04]  92.2,44.45 180 top
J132  [1X04_1MM_RA]  82.04,43.18 270 top
J133  [1X04_1MM_RA]  118.11,43.18 90 top
J134  PTH  [1X04]  115.57,44.45 180 top
J135  [1X04_1MM_RA]  105.41,43.18 270 top
J136  [1X04_1MM_RA]  141.48,43.18 90 top
J137  PTH  [1X04]  138.94,44.45 180 top
J138  [1X04_1MM_RA]  128.78,43.18 270 top
J139  [1X04_1MM_RA]  164.85,43.18 90 top
J140  PTH  [1X04]  162.31,44.45 180 top
J141  [1X04_1MM_RA]  152.15,43.18 270 top
J142  [1X04_1MM_RA]  188.21,43.18 90 top
J143  PTH  [1X04]  185.67,44.45 180 top
J144  [1X04_1MM_RA]  175.51,43.18 270 top
J145  [1X04_1MM_RA]  211.58,43.18 90 top
J146  PTH  [1X04]  209.04,44.45 180 top
J147  [1X04_1MM_RA]  198.88,43.18 270 top
J148  [1X04_1MM_RA]  234.95,43.18 90 top
J149  PTH  [1X04]  232.41,44.45 180 top
J150  [1X04_1MM_RA]  222.25,43.18 270 top
J151  [1X04_1MM_RA]  24.64,51.31 90 top
J152  PTH  [1X04]  22.1,52.58 180 top
J153  [1X04_1MM_RA]  11.94,51.31 270 top
J154  [1X04_1MM_RA]  48.01,51.31 90 top
J155  PTH  [1X04]  45.47,52.58 180 top
J156  [1X04_1MM_RA]  35.31,51.31 270 top
J157  [1X04_1MM_RA]  71.37,51.31 90 top
J158  PTH  [1X04]  68.83,52.58 180 top
J159  [1X04_1MM_RA]  58.67,51.31 270 top
J160  [1X04_1MM_RA]  94.74,51.31 90 top
J161  PTH  [1X04]  92.2,52.58 180 top
J162  [1X04_1MM_RA]  82.04,51.31 270 top
J163  [1X04_1MM_RA]  118.11,51.31 90 top
J164  PTH  [1X04]  115.57,52.58 180 top
J165  [1X04_1MM_RA]  105.41,51.31 270 top
J166  [1X04_1MM_RA]  141.48,51.31 90 top
J167  PTH  [1X04]  138.94,52.58 180 top
J168  [1X04_1MM_RA]  128.78,51.31 270 top
J169  [1X04_1MM_RA]  164.85,51.31 90 top
J170  PTH  [1X04]  162.31,52.58 180 top
J171  [1X04_1MM_RA]  152.15,51.31 270 top
J172  [1X04_1MM_RA]  188.21,51.31 90 top
J173  PTH  [1X04]  185.67,52.58 180 top
J174  [1X04_1MM_RA]  175.51,51.31 270 top
J175  [1X04_1MM_RA]  211.58,51.31 90 top
J176  PTH  [1X04]  209.04,52.58 180 top
J177  [1X04_1MM_RA]  198.88,51.31 270 top
J178  [1X04_1MM_RA]  234.95,51.31 90 top
J179  PTH  [1X04]  232.41,52.58 180 top
J180  [1X04_1MM_RA]  222.25,51.31 270 top
J181  [1X04_1MM_RA]  24.64,59.44 90 top
J182  PTH  [1X04]  22.1,60.71 180 top
J183  [1X04_1MM_RA]  11.94,59.44 270 top
J184  [1X04_1MM_RA]  48.01,59.44 90 top
J185  PTH  [1X04]  45.47,60.71 180 top
J186  [1X04_1MM_RA]  35.31,59.44 270 top
J187  [1X04_1MM_RA]  71.37,59.44 90 top
J188  PTH  [1X04]  68.83,60.71 180 top
J189  [1X04_1MM_RA]  58.67,59.44 270 top
J190  [1X04_1MM_RA]  94.74,59.44 90 top
J191  PTH  [1X04]  92.2,60.71 180 top
J192  [1X04_1MM_RA]  82.04,59.44 270 top
J193  [1X04_1MM_RA]  118.11,59.44 90 top
J194  PTH  [1X04]  115.57,60.71 180 top
J195  [1X04_1MM_RA]  105.41,59.44 270 top
J196  [1X04_1MM_RA]  141.48,59.44 90 top
J197  PTH  [1X04]  138.94,60.71 180 top
J198  [1X04_1MM_RA]  128.78,59.44 270 top
J199  [1X04_1MM_RA]  164.85,59.44 90 top
J200  PTH  [1X04]  162.31,60.71 180 top
J201  [1X04_1MM_RA]  152.15,59.44 270 top
J202  [1X04_1MM_RA]  188.21,59.44 90 top
J203  PTH  [1X04]  185.67,60.71 180 top
J204  [1X04_1MM_RA]  175.51,59.44 270 top
J205  [1X04_1MM_RA]  211.58,59.44 90 top
J206  PTH  [1X04]  209.04,60.71 180 top
J207  [1X04_1MM_RA]  198.88,59.44 270 top
J208  [1X04_1MM_RA]  234.95,59.44 90 top
J209  PTH  [1X04]  232.41,60.71 180 top
J210  [1X04_1MM_RA]  222.25,59.44 270 top
J211  [1X04_1MM_RA]  24.64,67.56 90 top
J212  PTH  [1X04]  22.1,68.83 180 top
J213  [1X04_1MM_RA]  11.94,67.56 270 top
J214  [1X04_1MM_RA]  48.01,67.56 90 top
J215  PTH  [1X04]  45.47,68.83 180 top
J216  [1X04_1MM_RA]  35.31,67.56 270 top
J217  [1X04_1MM_RA]  71.37,67.56 90 top
J218  PTH  [1X04]  68.83,68.83 180 top
J219  [1X04_1MM_RA]  58.67,67.56 270 top
J220  [1X04_1MM_RA]  94.74,67.56 90 top
J221  PTH  [1X04]  92.2,68.83 180 top
J222  [1X04_1MM_RA]  82.04,67.56 270 top
J223  [1X04_1MM_RA]  118.11,67.56 90 top
J224  PTH  [1X04]  115.57,68.83 180 top
J225  [1X04_1MM_RA]  105.41,67.56 270 top
J226  [1X04_1MM_RA]  141.48,67.56 90 top
J227  PTH  [1X04]  138.94,68.83 180 top
J228  [1X04_1MM_RA]  128.78,67.56 270 top
J229  [1X04_1MM_RA]  164.85,67.56 90 top
J230  PTH  [1X04]  162.31,68.83 180 top
J231  [1X04_1MM_RA]  152.15,67.56 270 top
J232  [1X04_1MM_RA]  188.21,67.56 90 top
J233  PTH  [1X04]  185.67,68.83 180 top
J234  [1X04_1MM_RA]  175.51,67.56 270 top
J235  [1X04_1MM_RA]  211.58,67.56 90 top
J236  PTH  [1X04]  209.04,68.83 180 top
J237  [1X04_1MM_RA]  198.88,67.56 270 top
J238  [1X04_1MM_RA]  234.95,67.56 90 top
J239  PTH  [1X04]  232.41,68.83 180 top
J240  [1X04_1MM_RA]  222.25,67.56 270 top
J241  [1X04_1MM_RA]  24.64,75.69 90 top
J242  PTH  [1X04]  22.1,76.96 180 top
J243  [1X04_1MM_RA]  11.94,75.69 270 top
J244  [1X04_1MM_RA]  48.01,75.69 90 top
J245  PTH  [1X04]  45.47,76.96 180 top
J246  [1X04_1MM_RA]  35.31,75.69 270 top
J247  [1X04_1MM_RA]  71.37,75.69 90 top
J248  PTH  [1X04]  68.83,76.96 180 top
J249  [1X04_1MM_RA]  58.67,75.69 270 top
J250  [1X04_1MM_RA]  94.74,75.69 90 top
J251  PTH  [1X04]  92.2,76.96 180 top
J252  [1X04_1MM_RA]  82.04,75.69 270 top
J253  [1X04_1MM_RA]  118.11,75.69 90 top
J254  PTH  [1X04]  115.57,76.96 180 top
J255  [1X04_1MM_RA]  105.41,75.69 270 top
J256  [1X04_1MM_RA]  141.48,75.69 90 top
J257  PTH  [1X04]  138.94,76.96 180 top
J258  [1X04_1MM_RA]  128.78,75.69 270 top
J259  [1X04_1MM_RA]  164.85,75.69 90 top
J260  PTH  [1X04]  162.31,76.96 180 top
J261  [1X04_1MM_RA]  152.15,75.69 270 top
J262  [1X04_1MM_RA]  188.21,75.69 90 top
J263  PTH  [1X04]  185.67,76.96 180 top
J264  [1X04_1MM_RA]  175.51,75.69 270 top
J265  [1X04_1MM_RA]  211.58,75.69 90 top
J266  PTH  [1X04]  209.04,76.96 180 top
J267  [1X04_1MM_RA]  198.88,75.69 270 top
J268  [1X04_1MM_RA]  234.95,75.69 90 top
J269  PTH  [1X04]  232.41,76.96 180 top
J270  [1X04_1MM_RA]  222.25,75.69 270 top
J271  [1X04_1MM_RA]  24.64,83.82 90 top
J272  PTH  [1X04]  22.1,85.09 180 top
J273  [1X04_1MM_RA]  11.94,83.82 270 top
J274  [1X04_1MM_RA]  48.01,83.82 90 top
J275  PTH  [1X04]  45.47,85.09 180 top
J276  [1X04_1MM_RA]  35.31,83.82 270 top
J277  [1X04_1MM_RA]  71.37,83.82 90 top
J278  PTH  [1X04]  68.83,85.09 180 top
J279  [1X04_1MM_RA]  58.67,83.82 270 top
J280  [1X04_1MM_RA]  94.74,83.82 90 top
J281  PTH  [1X04]  92.2,85.09 180 top
J282  [1X04_1MM_RA]  82.04,83.82 270 top
J283  [1X04_1MM_RA]  118.11,83.82 90 top
J284  PTH  [1X04]  115.57,85.09 180 top
J285  [1X04_1MM_RA]  105.41,83.82 270 top
J286  [1X04_1MM_RA]  141.48,83.82 90 top
J287  PTH  [1X04]  138.94,85.09 180 top
J288  [1X04_1MM_RA]  128.78,83.82 270 top
J289  [1X04_1MM_RA]  164.85,83.82 90 top
J290  PTH  [1X04]  162.31,85.09 180 top
J291  [1X04_1MM_RA]  152.15,83.82 270 top
J292  [1X04_1MM_RA]  188.21,83.82 90 top
J293  PTH  [1X04]  185.67,85.09 180 top
J294  [1X04_1MM_RA]  175.51,83.82 270 top
J295  [1X04_1MM_RA]  211.58,83.82 90 top
J296  PTH  [1X04]  209.04,85.09 180 top
J297  [1X04_1MM_RA]  198.88,83.82 270 top
J298  [1X04_1MM_RA]  234.95,83.82 90 top
J299  PTH  [1X04]  232.41,85.09 180 top
J300  [1X04_1MM_RA]  222.25,83.82 270 top
LOGO1  OSHW-LOGOS  [OSHW-LOGO-S]  50.55,10.67 0 bottom
LOGO2  OSHW-LOGOS  [OSHW-LOGO-S]  73.91,10.67 0 bottom
LOGO3  OSHW-LOGOS  [OSHW-LOGO-S]  97.28,10.67 0 bottom
LOGO4  OSHW-LOGOS  [OSHW-LOGO-S]  27.18,10.67 0 bottom
LOGO5  OSHW-LOGOS  [OSHW-LOGO-S]  120.65,10.67 0 bottom
LOGO6  OSHW-LOGOS  [OSHW-LOGO-S]  144.02,10.67 0 bottom
LOGO7  OSHW-LOGOS  [OSHW-LOGO-S]  167.39,10.67 0 bottom
LOGO8  OSHW-LOGOS  [OSHW-LOGO-S]  190.75,10.67 0 bottom
LOGO9  OSHW-LOGOS  [OSHW-LOGO-S]  214.12,10.67 0 bottom
LOGO10  OSHW-LOGOS  [OSHW-LOGO-S]  237.49,10.67 0 bottom
LOGO11  OSHW-LOGOS  [OSHW-LOGO-S]  27.18,18.8 0 bottom
LOGO12  OSHW-LOGOS  [OSHW-LOGO-S]  50.55,18.8 0 bottom
LOGO13  OSHW-LOGOS  [OSHW-LOGO-S]  73.91,18.8 0 bottom
LOGO14  OSHW-LOGOS  [OSHW-LOGO-S]  97.28,18.8 0 bottom
LOGO15  OSHW-LOGOS  [OSHW-LOGO-S]  120.65,18.8 0 bottom
LOGO16  OSHW-LOGOS  [OSHW-LOGO-S]  144.02,18.8 0 bottom
LOGO17  OSHW-LOGOS  [OSHW-LOGO-S]  167.39,18.8 0 bottom
LOGO18  OSHW-LOGOS  [OSHW-LOGO-S]  190.75,18.8 0 bottom
LOGO19  OSHW-LOGOS  [OSHW-LOGO-S]  214.12,18.8 0 bottom
LOGO20  OSHW-LOGOS  [OSHW-LOGO-S]  237.49,18.8 0 bottom
LOGO21  OSHW-LOGOS  [OSHW-LOGO-S]  27.18,26.92 0 bottom
LOGO22  OSHW-LOGOS  [OSHW-LOGO-S]  50.55,26.92 0 bottom
LOGO23  OSHW-LOGOS  [OSHW-LOGO-S]  73.91,26.92 0 bottom
LOGO24  OSHW-LOGOS  [OSHW-LOGO-S]  97.28,26.92 0 bottom
LOGO25  OSHW-LOGOS  [OSHW-LOGO-S]  120.65,26.92 0 bottom
LOGO26  OSHW-LOGOS  [OSHW-LOGO-S]  144.02,26.92 0 bottom
LOGO27  OSHW-LOGOS  [OSHW-LOGO-S]  167.39,26.92 0 bottom
LOGO28  OSHW-LOGOS  [OSHW-LOGO-S]  190.75,26.92 0 bottom
LOGO29  OSHW-LOGOS  [OSHW-LOGO-S]  214.12,26.92 0 bottom
LOGO30  OSHW-LOGOS  [OSHW-LOGO-S]  237.49,26.92 0 bottom
LOGO31  OSHW-LOGOS  [OSHW-LOGO-S]  27.18,35.05 0 bottom
LOGO32  OSHW-LOGOS  [OSHW-LOGO-S]  50.55,35.05 0 bottom
LOGO33  OSHW-LOGOS  [OSHW-LOGO-S]  73.91,35.05 0 bottom
LOGO34  OSHW-LOGOS  [OSHW-LOGO-S]  97.28,35.05 0 bottom
LOGO35  OSHW-LOGOS  [OSHW-LOGO-S]  120.65,35.05 0 bottom
LOGO36  OSHW-LOGOS  [OSHW-LOGO-S]  144.02,35.05 0 bottom
LOGO37  OSHW-LOGOS  [OSHW-LOGO-S]  167.39,35.05 0 bottom
LOGO38  OSHW-LOGOS  [OSHW-LOGO-S]  190.75,35.05 0 bottom
LOGO39  OSHW-LOGOS  [OSHW-LOGO-S]  214.12,35.05 0 bottom
LOGO40  OSHW-LOGOS  [OSHW-LOGO-S]  237.49,35.05 0 bottom
LOGO41  OSHW-LOGOS  [OSHW-LOGO-S]  27.18,43.18 0 bottom
LOGO42  OSHW-LOGOS  [OSHW-LOGO-S]  50.55,43.18 0 bottom
LOGO43  OSHW-LOGOS  [OSHW-LOGO-S]  73.91,43.18 0 bottom
LOGO44  OSHW-LOGOS  [OSHW-LOGO-S]  97.28,43.18 0 bottom
LOGO45  OSHW-LOGOS  [OSHW-LOGO-S]  120.65,43.18 0 bottom
LOGO46  OSHW-LOGOS  [OSHW-LOGO-S]  144.02,43.18 0 bottom
LOGO47  OSHW-LOGOS  [OSHW-LOGO-S]  167.39,43.18 0 bottom
LOGO48  OSHW-LOGOS  [OSHW-LOGO-S]  190.75,43.18 0 bottom
LOGO49  OSHW-LOGOS  [OSHW-LOGO-S]  214.12,43.18 0 bottom
LOGO50  OSHW-LOGOS  [OSHW-LOGO-S]  237.49,43.18 0 bottom
LOGO51  OSHW-LOGOS  [OSHW-LOGO-S]  27.18,51.31 0 bottom
LOGO52  OSHW-LOGOS  [OSHW-LOGO-S]  50.55,51.31 0 bottom
LOGO53  OSHW-LOGOS  [OSHW-LOGO-S]  73.91,51.31 0 bottom
LOGO54  OSHW-LOGOS  [OSHW-LOGO-S]  97.28,51.31 0 bottom
LOGO55  OSHW-LOGOS  [OSHW-LOGO-S]  120.65,51.31 0 bottom
LOGO56  OSHW-LOGOS  [OSHW-LOGO-S]  144.02,51.31 0 bottom
LOGO57  OSHW-LOGOS  [OSHW-LOGO-S]  167.39,51.31 0 bottom
LOGO58  OSHW-LOGOS  [OSHW-LOGO-S]  190.75,51.31 0 bottom
LOGO59  OSHW-LOGOS  [OSHW-LOGO-S]  214.12,51.31 0 bottom
LOGO60  OSHW-LOGOS  [OSHW-LOGO-S]  237.49,51.31 0 bottom
LOGO61  OSHW-LOGOS  [OSHW-LOGO-S]  27.18,59.44 0 bottom
LOGO62  OSHW-LOGOS  [OSHW-LOGO-S]  50.55,59.44 0 bottom
LOGO63  OSHW-LOGOS  [OSHW-LOGO-S]  73.91,59.44 0 bottom
LOGO64  OSHW-LOGOS  [OSHW-LOGO-S]  97.28,59.44 0 bottom
LOGO65  OSHW-LOGOS  [OSHW-LOGO-S]  120.65,59.44 0 bottom
LOGO66  OSHW-LOGOS  [OSHW-LOGO-S]  144.02,59.44 0 bottom
LOGO67  OSHW-LOGOS  [OSHW-LOGO-S]  167.39,59.44 0 bottom
LOGO68  OSHW-LOGOS  [OSHW-LOGO-S]  190.75,59.44 0 bottom
LOGO69  OSHW-LOGOS  [OSHW-LOGO-S]  214.12,59.44 0 bottom
LOGO70  OSHW-LOGOS  [OSHW-LOGO-S]  237.49,59.44 0 bottom
LOGO71  OSHW-LOGOS  [OSHW-LOGO-S]  27.18,67.56 0 bottom
LOGO72  OSHW-LOGOS  [OSHW-LOGO-S]  50.55,67.56 0 bottom
LOGO73  OSHW-LOGOS  [OSHW-LOGO-S]  73.91,67.56 0 bottom
LOGO74  OSHW-LOGOS  [OSHW-LOGO-S]  97.28,67.56 0 bottom
LOGO75  OSHW-LOGOS  [OSHW-LOGO-S]  120.65,67.56 0 bottom
LOGO76  OSHW-LOGOS  [OSHW-LOGO-S]  144.02,67.56 0 bottom
LOGO77  OSHW-LOGOS  [OSHW-LOGO-S]  167.39,67.56 0 bottom
LOGO78  OSHW-LOGOS  [OSHW-LOGO-S]  190.75,67.56 0 bottom
LOGO79  OSHW-LOGOS  [OSHW-LOGO-S]  214.12,67.56 0 bottom
LOGO80  OSHW-LOGOS  [OSHW-LOGO-S]  237.49,67.56 0 bottom
LOGO81  OSHW-LOGOS  [OSHW-LOGO-S]  27.18,75.69 0 bottom
LOGO82  OSHW-LOGOS  [OSHW-LOGO-S]  50.55,75.69 0 bottom
LOGO83  OSHW-LOGOS  [OSHW-LOGO-S]  73.91,75.69 0 bottom
LOGO84  OSHW-LOGOS  [OSHW-LOGO-S]  97.28,75.69 0 bottom
LOGO85  OSHW-LOGOS  [OSHW-LOGO-S]  120.65,75.69 0 bottom
LOGO86  OSHW-LOGOS  [OSHW-LOGO-S]  144.02,75.69 0 bottom
LOGO87  OSHW-LOGOS  [OSHW-LOGO-S]  167.39,75.69 0 bottom
LOGO88  OSHW-LOGOS  [OSHW-LOGO-S]  190.75,75.69 0 bottom
LOGO89  OSHW-LOGOS  [OSHW-LOGO-S]  214.12,75.69 0 bottom
LOGO90  OSHW-LOGOS  [OSHW-LOGO-S]  237.49,75.69 0 bottom
LOGO91  OSHW-LOGOS  [OSHW-LOGO-S]  27.18,83.82 0 bottom
LOGO92  OSHW-LOGOS  [OSHW-LOGO-S]  50.55,83.82 0 bottom
LOGO93  OSHW-LOGOS  [OSHW-LOGO-S]  73.91,83.82 0 bottom
LOGO94  OSHW-LOGOS  [OSHW-LOGO-S]  97.28,83.82 0 bottom
LOGO95  OSHW-LOGOS  [OSHW-LOGO-S]  120.65,83.82 0 bottom
LOGO96  OSHW-LOGOS  [OSHW-LOGO-S]  144.02,83.82 0 bottom
LOGO97  OSHW-LOGOS  [OSHW-LOGO-S]  167.39,83.82 0 bottom
LOGO98  OSHW-LOGOS  [OSHW-LOGO-S]  190.75,83.82 0 bottom
LOGO99  OSHW-LOGOS  [OSHW-LOGO-S]  214.12,83.82 0 bottom
LOGO100  OSHW-LOGOS  [OSHW-LOGO-S]  237.49,83.82 0 bottom
U$1  SFE_LOGO_FLAME.1_INCH  [SFE_LOGO_FLAME_.1]  9.65,9.65 90 bottom
U$2  SFE_LOGO_FLAME.1_INCH  [SFE_LOGO_FLAME_.1]  33.02,9.65 90 bottom
U$3  SFE_LOGO_FLAME.1_INCH  [SFE_LOGO_FLAME_.1]  56.39,9.65 90 bottom
U$4  SFE_LOGO_FLAME.1_INCH  [SFE_LOGO_FLAME_.1]  79.76,9.65 90 bottom
U$5  SFE_LOGO_FLAME.1_INCH  [SFE_LOGO_FLAME_.1]  103.12,9.65 90 bottom
U$6  SFE_LOGO_FLAME.1_INCH  [SFE_LOGO_FLAME_.1]  126.49,9.65 90 bottom
U$7  SFE_LOGO_FLAME.1_INCH  [SFE_LOGO_FLAME_.1]  149.86,9.65 90 bottom
U$8  SFE_LOGO_FLAME.1_INCH  [SFE_LOGO_FLAME_.1]  173.23,9.65 90 bottom
U$9  SFE_LOGO_FLAME.1_INCH  [SFE_LOGO_FLAME_.1]  196.6,9.65 90 bottom
U$10  SFE_LOGO_FLAME.1_INCH  [SFE_LOGO_FLAME_.1]  219.96,9.65 90 bottom
U$11  SFE_LOGO_FLAME.1_INCH  [SFE_LOGO_FLAME_.1]  9.65,17.78 90 bottom
U$12  SFE_LOGO_FLAME.1_INCH  [SFE_LOGO_FLAME_.1]  33.02,17.78 90 bottom
U$13  SFE_LOGO_FLAME.1_INCH  [SFE_LOGO_FLAME_.1]  56.39,17.78 90 bottom
U$14  SFE_LOGO_FLAME.1_INCH  [SFE_LOGO_FLAME_.1]  79.76,17.78 90 bottom
U$15  SFE_LOGO_FLAME.1_INCH  [SFE_LOGO_FLAME_.1]  103.12,17.78 90 bottom
U$16  SFE_LOGO_FLAME.1_INCH  [SFE_LOGO_FLAME_.1]  126.49,17.78 90 bottom
U$17  SFE_LOGO_FLAME.1_INCH  [SFE_LOGO_FLAME_.1]  149.86,17.78 90 bottom
U$18  SFE_LOGO_FLAME.1_INCH  [SFE_LOGO_FLAME_.1]  173.23,17.78 90 bottom
U$19  SFE_LOGO_FLAME.1_INCH  [SFE_LOGO_FLAME_.1]  196.6,17.78 90 bottom
U$20  SFE_LOGO_FLAME.1_INCH  [SFE_LOGO_FLAME_.1]  219.96,17.78 90 bottom
U$21  SFE_LOGO_FLAME.1_INCH  [SFE_LOGO_FLAME_.1]  9.65,25.91 90 bottom
U$22  SFE_LOGO_FLAME.1_INCH  [SFE_LOGO_FLAME_.1]  33.02,25.91 90 bottom
U$23  SFE_LOGO_FLAME.1_INCH  [SFE_LOGO_FLAME_.1]  56.39,25.91 90 bottom
U$24  SFE_LOGO_FLAME.1_INCH  [SFE_LOGO_FLAME_.1]  79.76,25.91 90 bottom
U$25  SFE_LOGO_FLAME.1_INCH  [SFE_LOGO_FLAME_.1]  103.12,25.91 90 bottom
U$26  SFE_LOGO_FLAME.1_INCH  [SFE_LOGO_FLAME_.1]  126.49,25.91 90 bottom
U$27  SFE_LOGO_FLAME.1_INCH  [SFE_LOGO_FLAME_.1]  149.86,25.91 90 bottom
U$28  SFE_LOGO_FLAME.1_INCH  [SFE_LOGO_FLAME_.1]  173.23,25.91 90 bottom
U$29  SFE_LOGO_FLAME.1_INCH  [SFE_LOGO_FLAME_.1]  196.6,25.91 90 bottom
U$30  SFE_LOGO_FLAME.1_INCH  [SFE_LOGO_FLAME_.1]  219.96,25.91 90 bottom
U$31  SFE_LOGO_FLAME.1_INCH  [SFE_LOGO_FLAME_.1]  9.65,34.04 90 bottom
U$32  SFE_LOGO_FLAME.1_INCH  [SFE_LOGO_FLAME_.1]  33.02,34.04 90 bottom
U$33  SFE_LOGO_FLAME.1_INCH  [SFE_LOGO_FLAME_.1]  56.39,34.04 90 bottom
U$34  SFE_LOGO_FLAME.1_INCH  [SFE_LOGO_FLAME_.1]  79.76,34.04 90 bottom
U$35  SFE_LOGO_FLAME.1_INCH  [SFE_LOGO_FLAME_.1]  103.12,34.04 90 bottom
U$36  SFE_LOGO_FLAME.1_INCH  [SFE_LOGO_FLAME_.1]  126.49,34.04 90 bottom
U$37  SFE_LOGO_FLAME.1_INCH  [SFE_LOGO_FLAME_.1]  149.86,34.04 90 bottom
U$38  SFE_LOGO_FLAME.1_INCH  [SFE_LOGO_FLAME_.1]  173.23,34.04 90 bottom
U$39  SFE_LOGO_FLAME.1_INCH  [SFE_LOGO_FLAME_.1]  196.6,34.04 90 bottom
U$40  SFE_LOGO_FLAME.1_INCH  [SFE_LOGO_FLAME_.1]  219.96,34.04 90 bottom
U$41  SFE_LOGO_FLAME.1_INCH  [SFE_LOGO_FLAME_.1]  9.65,42.16 90 bottom
U$42  SFE_LOGO_FLAME.1_INCH  [SFE_LOGO_FLAME_.1]  33.02,42.16 90 bottom
U$43  SFE_LOGO_FLAME.1_INCH  [SFE_LOGO_FLAME_.1]  56.39,42.16 90 bottom
U$44  SFE_LOGO_FLAME.1_INCH  [SFE_LOGO_FLAME_.1]  79.76,42.16 90 bottom
U$45  SFE_LOGO_FLAME.1_INCH  [SFE_LOGO_FLAME_.1]  103.12,42.16 90 bottom
U$46  SFE_LOGO_FLAME.1_INCH  [SFE_LOGO_FLAME_.1]  126.49,42.16 90 bottom
U$47  SFE_LOGO_FLAME.1_INCH  [SFE_LOGO_FLAME_.1]  149.86,42.16 90 bottom
U$48  SFE_LOGO_FLAME.1_INCH  [SFE_LOGO_FLAME_.1]  173.23,42.16 90 bottom
U$49  SFE_LOGO_FLAME.1_INCH  [SFE_LOGO_FLAME_.1]  196.6,42.16 90 bottom
U$50  SFE_LOGO_FLAME.1_INCH  [SFE_LOGO_FLAME_.1]  219.96,42.16 90 bottom
U$51  SFE_LOGO_FLAME.1_INCH  [SFE_LOGO_FLAME_.1]  9.65,50.29 90 bottom
U$52  SFE_LOGO_FLAME.1_INCH  [SFE_LOGO_FLAME_.1]  33.02,50.29 90 bottom
U$53  SFE_LOGO_FLAME.1_INCH  [SFE_LOGO_FLAME_.1]  56.39,50.29 90 bottom
U$54  SFE_LOGO_FLAME.1_INCH  [SFE_LOGO_FLAME_.1]  79.76,50.29 90 bottom
U$55  SFE_LOGO_FLAME.1_INCH  [SFE_LOGO_FLAME_.1]  103.12,50.29 90 bottom
U$56  SFE_LOGO_FLAME.1_INCH  [SFE_LOGO_FLAME_.1]  126.49,50.29 90 bottom
U$57  SFE_LOGO_FLAME.1_INCH  [SFE_LOGO_FLAME_.1]  149.86,50.29 90 bottom
U$58  SFE_LOGO_FLAME.1_INCH  [SFE_LOGO_FLAME_.1]  173.23,50.29 90 bottom
U$59  SFE_LOGO_FLAME.1_INCH  [SFE_LOGO_FLAME_.1]  196.6,50.29 90 bottom
U$60  SFE_LOGO_FLAME.1_INCH  [SFE_LOGO_FLAME_.1]  219.96,50.29 90 bottom
U$61  SFE_LOGO_FLAME.1_INCH  [SFE_LOGO_FLAME_.1]  9.65,58.42 90 bottom
U$62  SFE_LOGO_FLAME.1_INCH  [SFE_LOGO_FLAME_.1]  33.02,58.42 90 bottom
U$63  SFE_LOGO_FLAME.1_INCH  [SFE_LOGO_FLAME_.1]  56.39,58.42 90 bottom
U$64  SFE_LOGO_FLAME.1_INCH  [SFE_LOGO_FLAME_.1]  79.76,58.42 90 bottom
U$65  SFE_LOGO_FLAME.1_INCH  [SFE_LOGO_FLAME_.1]  103.12,58.42 90 bottom
U$66  SFE_LOGO_FLAME.1_INCH  [SFE_LOGO_FLAME_.1]  126.49,58.42 90 bottom
U$67  SFE_LOGO_FLAME.1_INCH  [SFE_LOGO_FLAME_.1]  149.86,58.42 90 bottom
U$68  SFE_LOGO_FLAME.1_INCH  [SFE_LOGO_FLAME_.1]  173.23,58.42 90 bottom
U$69  SFE_LOGO_FLAME.1_INCH  [SFE_LOGO_FLAME_.1]  196.6,58.42 90 bottom
U$70  SFE_LOGO_FLAME.1_INCH  [SFE_LOGO_FLAME_.1]  219.96,58.42 90 bottom
U$71  SFE_LOGO_FLAME.1_INCH  [SFE_LOGO_FLAME_.1]  9.65,66.55 90 bottom
U$72  SFE_LOGO_FLAME.1_INCH  [SFE_LOGO_FLAME_.1]  33.02,66.55 90 bottom
U$73  SFE_LOGO_FLAME.1_INCH  [SFE_LOGO_FLAME_.1]  56.39,66.55 90 bottom
U$74  SFE_LOGO_FLAME.1_INCH  [SFE_LOGO_FLAME_.1]  79.76,66.55 90 bottom
U$75  SFE_LOGO_FLAME.1_INCH  [SFE_LOGO_FLAME_.1]  103.12,66.55 90 bottom